# Altium PCB Himax.PcbDoc
Units mil, origin at the board's own origin, x right, y up, seen from the top; angles counter-clockwise.
Board outline 895 x 660 mil, 4 copper layers (Top Layer, GND, Signal Layer, Bottom Layer), stack 61.811 mil thick; 10 components, 15 nets, 62 pads, 14 vias.
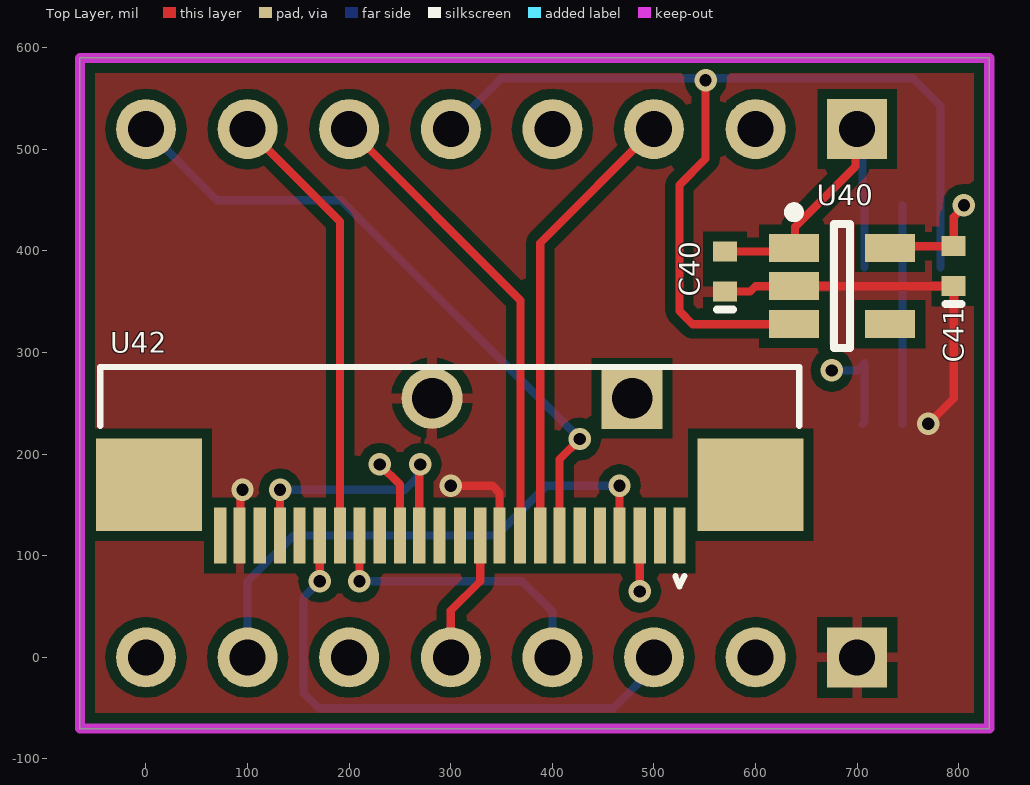
[diagram p0: Top Layer view]
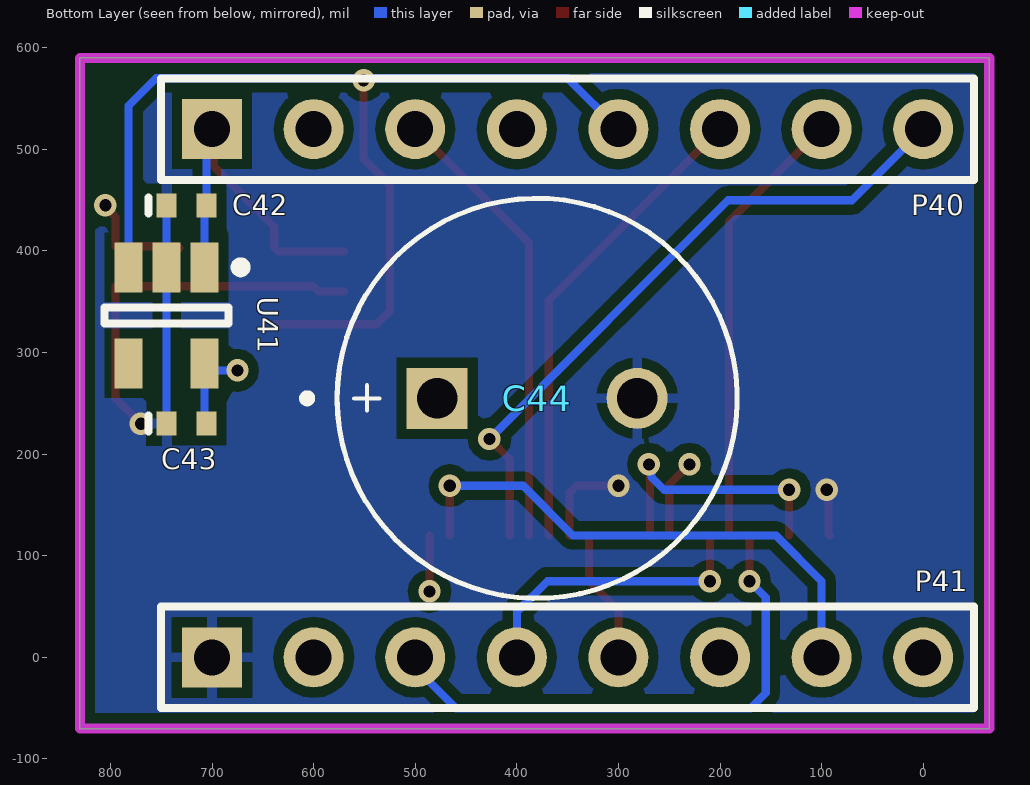
[diagram p1: Bottom Layer view, seen from below]
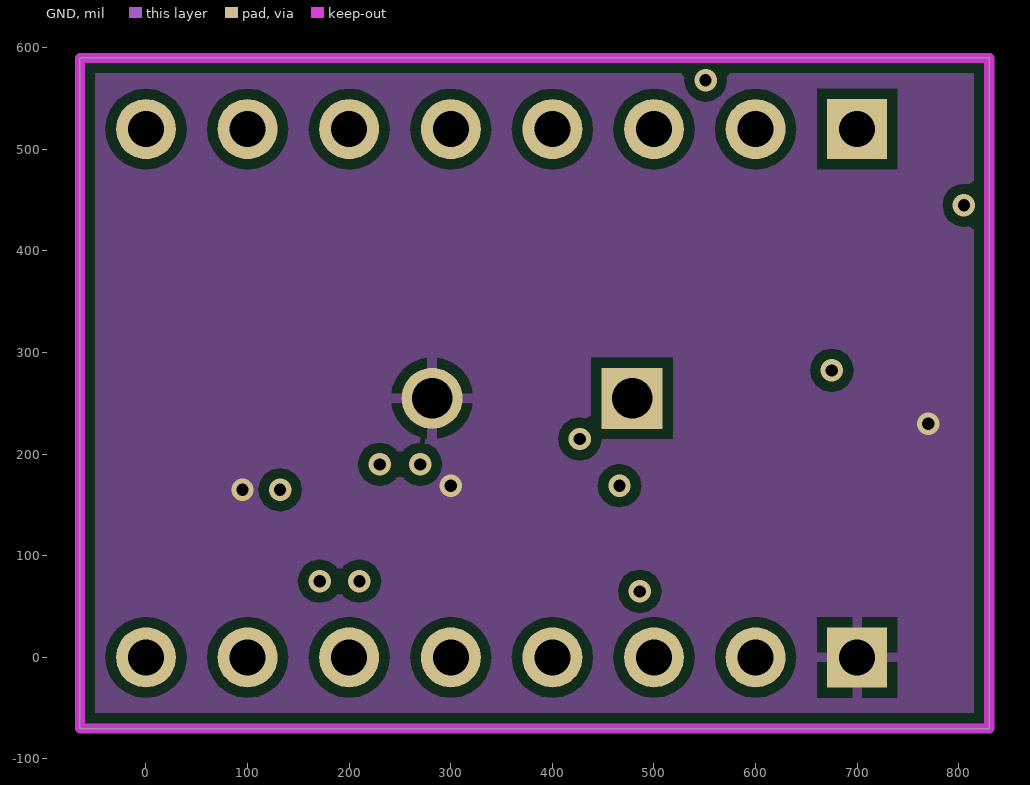
[diagram p2: GND]
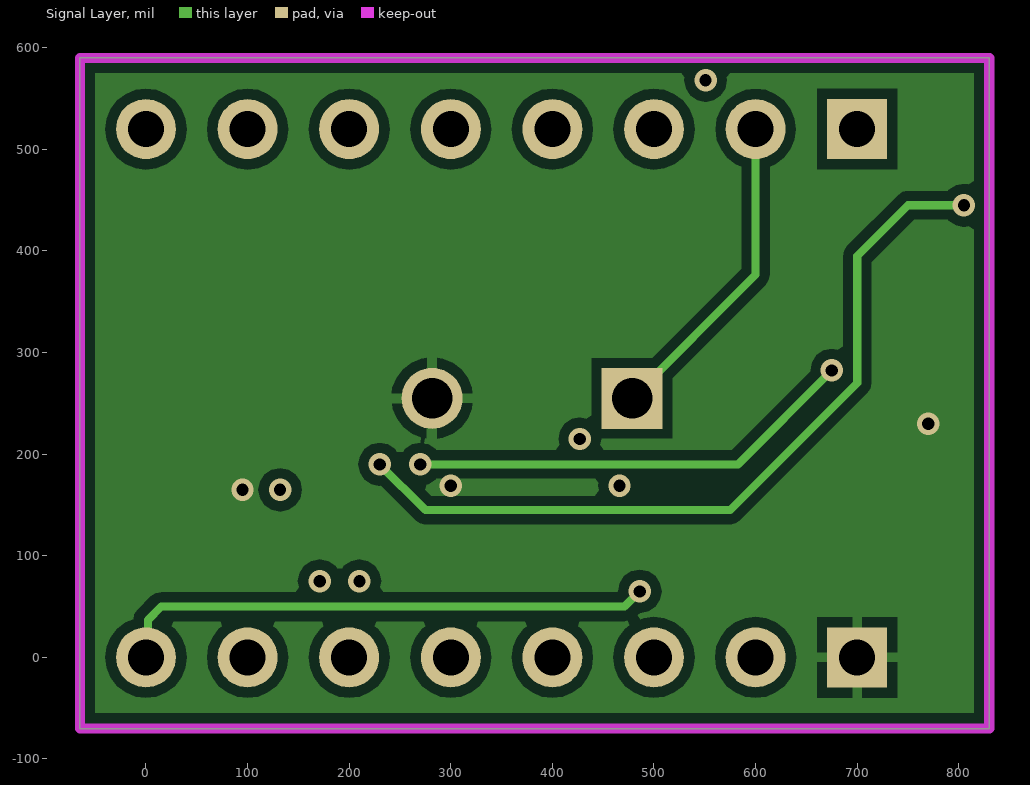
[diagram p3: Signal Layer]

## Layer stack, top to bottom
Top Solder: solder mask 0.7874, SM-001, Dk 4
Top Layer: signal copper 1.378
Dielectric 1: core 7.874, Core-043, Dk 4.3
GND: signal copper 0.689
Dielectric 3: prepreg 41.9291, Dk 4.2
Signal Layer: signal copper 0.689
Dielectric 2: core 7.874, Dk 4.2
Bottom Layer: signal copper 1.378
Bottom Solder: solder mask 0.7874, SM-001, Dk 4

## Board outline
-65,-70 -65,590 830,590 830,-70

## Design rules (kind name [scope] priority, off if disabled: settings)
Clearance Clearance_poly [InPolygon] p1: gap=10 ignorepadtopadclearanceinfootprint=FALSE
Clearance [All] p2: gap=6 ignorepadtopadclearanceinfootprint=FALSE except(10: THPad-Fill THPad-Poly THPad-Region Via-Fill Via-Poly Via-Region)
MinimumSolderMaskSliver [All] p1: minsoldermaskwidth=1
PolygonConnect [All] p1: thpad.connectstyle=Relief thpad.reliefconductorwidth=10 thpad.reliefentries=4 thpad.polygonreliefangle="90 Angle" thpad.airgapwidth=10 smdpad.connectstyle=Relief smdpad.reliefconductorwidth=10 smdpad.reliefentries=4 smdpad.polygonreliefangle="90 Angle" smdpad.airgapwidth=10 via.connectstyle=Direct via.reliefconductorwidth=10 via.reliefentries=4 via.polygonreliefangle="90 Angle" via.airgapwidth=10
RoomDefinition Himax [InComponentClass('Himax')] p1 off: confinementstyle=ConfineIn formatcopy=TRUE lockcomponents=FALSE outline -143.94,21.06 -143.94,548.94 113.35,548.94 113.35,581.34 188.35,581.34 188.35,585.37 251.65,585.37 251.65,579.37 286.65,579.37 286.65,576.65 449.37,576.65 449.37,565.94 486.69,565.94 486.69,401.26 491.69,401.26 491.69,253.18 493,253.18 493,248.02 501.47,248.02 501.47,-9.52 483.94,-9.52 483.94,-78.94 -43.94,-78.94 -43.94,21.06
RoutingVias [All] p1: holewidth=9.84 width=19.68 viastyle="Through Hole" minholewidth=7.87 minwidth=17.72 maxholewidth=19.68 maxwidth=39.37
SilkToSilkClearance [All] p1: silktosilkclearance=1
SilkToSolderMaskClearance [IsPad] p1: minsilkscreentomaskgap=1 clearancetoexposedcopper=TRUE
SolderMaskExpansion [All] p1: expansion=4 istentingtop=FALSE
SupplyNets "Schematic Supply Nets_3" [InNet('3V3')] p1: voltage=0.000
SupplyNets "Schematic Supply Nets_2" [InNet('VDD2V8')] p2: voltage=0.000
SupplyNets "Schematic Supply Nets_1" [InNet('GND')] p3: voltage=0.000
SupplyNets "Schematic Supply Nets" [InNet('VDD1V8')] p4: voltage=0.000
Width [All] p1: maxlimit=12 minlimit=6 preferedwidth=8 midlayer1_maxwidth=10 midlayer2_maxwidth=10 minimp=50.000000 maximp=50.000000 favimp=50.000000
27 further rules are at their usual default settings.

## Components (designator, comment, footprint, x,y, rotation, side; value= is the part's Value field where it differs from the comment)
C40 "Generic ceramic capacitor" 0402 570,379.69 r90 top value=1uF
C41 "Generic ceramic capacitor" 0402 795,385 r90 top value=1uF
C42 "Generic ceramic capacitor" 0402 725,445 r180 bottom value=1uF
C43 "Generic ceramic capacitor" 0402 725,230 r180 bottom value=1uF
C44 "Generic electrolytic capacitor" CAPPRD500W60D1000H3200 380,255 r180 bottom value=DNP
P40 "Header 8" HDR1X8 700,520 r180 bottom
P41 "Header 8" HDR1X8 700,0 r180 bottom
U40 "TPS70618" TI-DDC5_M 685,365.31 r0 top
U41 "TPS70628" TI-DDC5_M 744.69,336.74 r270 bottom
U42 "SFV24R-1STE1HLF" FCI_SFV24R-2STE1LF 299,38 r0 top

## Footprints (in the part's own frame and the unit in brackets; to place one, negate y for a bottom-side part, rotate by r counter-clockwise, add the part's x,y. Pads: shape width x height; smd on the part's side, far side on the other; paste and mask are expansions set on the pad)
0402 [mm] "Surface Mount; Body 1 x 0.5 mm (LxW typ)"
  rect 0.5x0.6 smd: 1(-0.5,0) 2(0.5,0)
  silkscreen extent -0.95,-0.2 -0.95,0.2, body extent -0.5,-0.25 0.5,0.25, height 0.5
CAPPRD500W60D1000H3200 [mil]
  round 60 hole 40: N(98.43,0)
  rect 60x60 hole 40: P(-98.43,0)
  silkscreen extent -230,-197 197,197
FCI_SFV24R-2STE1LF [mil]
  rect 12x55 smd: 1(-226,82) 2(-207,82) 3(-187,82) 4(-167,82) 5(-148,82) 6(-128,82) 7(-108,82) 8(-89,82) 9(-69,82) 10(-49,82) 11(-30,82) 12(-10,82) 13(10,82) 14(30,82) 15(49,82) 16(69,82) 17(89,82) 18(108,82) 19(128,82) 20(148,82) 21(167,82) 22(187,82) 23(207,82) 24(226,82)
  rect 104x91 smd: 25(-296,132) 26(296,132)
  silkscreen extent -344,32 344,248
HDR1X8 [mm] "Connector; Header; 8 Position"
  rect 1.5x1.5 hole 0.9: 1(0,0)
  round 1.5 hole 0.9: 2(2.54,0) 3(5.08,0) 4(7.62,0) 5(10.16,0) 6(12.7,0) 7(15.24,0) 8(17.78,0)
  silkscreen extent -1.27,-1.27 19.05,1.27
TI-DDC5_M [mm] "SOT23, 5-Leads, Body 2.9x1.6mm, Pitch 0.95mm, IPC Low Density"
  rect 1.25x0.7 smd: 1(-1.2,0.95) 2(-1.2,0) 3(-1.2,-0.95) 4(1.2,-0.95) 5(1.2,0.95)
  silkscreen extent -1.32,-1.55 0.2,1.97, body extent -0.87,-1.52 0.87,1.53, height 1.1

## Part data
C40 C41 C42 C43: library part C-1uF-10V-X5R-0402, "CAP CER 1UF 10V X5R 0402", Digi-Key Part Number=1276-1076-1-ND, Manufacturer="Samsung Electro-Mechanics", Manufacturer Part Number=CL05A105KP5NNNC, Rating="10V, -55~85C", Tolerance=+-10%
C44: library part cap_electrolytic, "Electrolytic capacitor", Note=10mF
P40 P41: "Header, 8-Pin", LatestRevisionDate=17-Jul-2002, LatestRevisionNote="Re-released for DXP Platform.", Publisher="Altium Limited"
U40: library part TPS706xx, "Linear Voltage Regulator IC Positive Fixed 1 Output 150mA SOT-23-5", Case/Package=SOT-23-5, Digi-Key Part Number=296-47896-1-ND, Dropout Voltage=245mV, Manufacturer="Texas Instruments", Manufacturer Part Number=TPS70618DBVR, Max Input Voltage=6.5V, Max Operating Temperature=125°C, Max Output Current=150mA, Min Current Limit=200mA, Min Input Voltage=2.7V, Min Operating Temperature=-40°C, Quiescent Current=1.3uA, Accuracy=2%, ComponentLink1Description="Manufacturer URL", ComponentLink1URL=http://www.ti.com/, ComponentLink2Description=Datasheet, ComponentLink2URL=http://www.ti.com/general/docs/lit/getliterature.tsp?genericPartNumber=TPS78001&fileType=pdf, ComponentLink3Description="Package Specification", ComponentLink3URL=http://www.ti.com/litv/pdf/mpds123d, Contact Plating=Gold, Lead Free="Lead Free", Mount="Surface Mount", Number of Outputs=1, Number of Pins=5, Number of Regulators=1, Output Current=150mA, Output Type=Fixed, Packaging="Cut Tape", Polarity=Positive, REACH SVHC="No SVHC"
U41: library part TPS706xx, "Linear Voltage Regulator IC Positive Fixed 1 Output 150mA SOT-23-5", Case/Package=SOT-23-5, Digi-Key Part Number=296-50141-1-ND, Dropout Voltage=245mV, Manufacturer="Texas Instruments", Manufacturer Part Number=TPS70628DBVR, Max Input Voltage=6.5V, Max Operating Temperature=125°C, Max Output Current=150mA, Min Current Limit=200mA, Min Input Voltage=2.7V, Min Operating Temperature=-40°C, Quiescent Current=1.3uA, Accuracy=2%, ComponentLink1Description="Manufacturer URL", ComponentLink1URL=http://www.ti.com/, ComponentLink2Description=Datasheet, ComponentLink2URL=http://www.ti.com/general/docs/lit/getliterature.tsp?genericPartNumber=TPS78001&fileType=pdf, ComponentLink3Description="Package Specification", ComponentLink3URL=http://www.ti.com/litv/pdf/mpds123d, Contact Plating=Gold, Lead Free="Lead Free", Mount="Surface Mount", Number of Outputs=1, Number of Pins=5, Number of Regulators=1, Output Current=150mA, Output Type=Fixed, Packaging="Cut Tape", Polarity=Positive, REACH SVHC="No SVHC"
U42: "Himax Camera Connector", Contact Resistance=30mR, Current Rating=500mA, Flammability Rating="UL94 V-0", Housing Color=Black, Insulation Resistance=100MR, Manufacturer="Amphenol FCI", Max Operating Temperature=105°C, Max Voltage Rating (AC)=50V, Min Operating Temperature=-55°C, Package Quantity=3000, Supplier Part Number 1=609-4320-1-ND, Actuator Material=Glass,Polyphenylene, ComponentLink1Description=http://portal.fciconnect.com/Comergent/fci/drawing/10112793.pdf?src-supplier=Avnet, ComponentLink1URL=http://portal.fciconnect.com/Comergent/fci/drawing/10112793.pdf?src-supplier=Avnet, ComponentLink2Description=https://cdn.amphenol-icc.com/media/wysiwyg/files/drawing/10112793.pdf?src-supplier=Digi-Key, ComponentLink2URL=https://cdn.amphenol-icc.com/media/wysiwyg/files/drawing/10112793.pdf?src-supplier=Digi-Key, ComponentLink3Description=http://portal.fciconnect.com/Comergent//fci/drawing/10112793.pdf?src-supplier=Mouser, ComponentLink3URL=http://portal.fciconnect.com/Comergent//fci/drawing/10112793.pdf?src-supplier=Mouser, Contact Location=Bottom, Contact Material=Bronze, Contact Plating=Tin, Depth=4.9mm, Housing Material=Polymer, Lead Free="Lead Free", Length=17.5mm, Manufacturer Part Number=SFV24R-1STE1HLF, Max Voltage Rating (DC)=50V, Mount="Surface Mount", Number of Contacts=24, Number of Positions=24, Number of Rows=1, Orientation="Right Angle", Packaging="Tape and Reel", Pitch=0.5mm, Pricing 1="1=0.76, 10=0.67, 25=0.6308, 50=0.6044, 100=0.5782, 250=0.5256, 500=0.47304, 1000=0.42048 (USD)", Radiation Hardening=No, Stock 1=0, Supplier 1=Digi-Key, Termination=Solder, Voltage Rating=50V, Wire/Cable Type=Straight

## Via types
v1: diameter 22, hole 12, Top Layer to Bottom Layer, tented both sides, 14 vias

## Nets (pads, with @x,y where several pads share a name; then routed paths per layer and width w, separated by ;. In a path a pad name is that pad's centre, name@x,y a point inside that pad or via, vN(x,y) a via of type N, cw(c..) or ccw(c..) an arc to the next point about the centre after c; other vN are vias at no path point)
3V3: C40.2 C42.2 P40.1 U40.1 U41.1 | length 351.2
  Top Layer w8: C40.2 634.41,399.37 U40.1 638.81,403.77 638.81,423.81 698.16,483.16 698.16,518.16 P40.1
  Bottom Layer w8: P40.1 705.31,514.69 C42.2 707.28,443.03 U41.1
Boost: C44.P P40.2 | length 315.4
  Signal Layer w8: C44.P 600,376.57 P40.2
D0: P41.5 U42.14 | length 132
  Top Layer w8: P41.5 300,46 329,75 U42.14
EN_CAM: P40.5 U40.3 U41.3 | length 1029.9
  Top Layer w8: v1(550.8,568) 550.8,490.8 525,465 525,341 538.09,327.91 U40.3
  Bottom Layer w8: P40.5 350,570 548.8,570 v1(550.8,568) ; v1@550.8,569.24 551.55,570 755,570 782.09,542.91 U41.3
FVLD: P41.3 U42.6 | length 539.4
  Top Layer w8: v1(171,75) U42.6
  Bottom Layer w8: v1(171,75) 155,59 155,-35 170,-50 460,-50 500,-10 P41.3
GND: C40.1 C41.1 C42.1 C43.1 C44.N P41.1 U40.2 U41.2 U42.2 U42.15 | length 727
  Top Layer w8: U42.2 93.16,121.16 93.16,163.16 v1(95,165) ; v1(300,169) 341,169 348,162 U42.15 ; C40.1 594.69,360 600,365.31 U40.2 C41.1 795,255 v1(770,230)
  Bottom Layer w8: C43.1 U41.2 C42.1
INT: P40.8 U42.18 | length 656.6
  Top Layer w8: U42.18 407,195 v1(427,215)
  Bottom Layer w8: P40.8 70,450 192,450 v1(427,215)
LVLD: P40.6 U42.16 | length 470.1
  Top Layer w8: P40.6 368.58,351.42 368.58,120.58 U42.16
MCLK: P41.4 U42.8 | length 292.4
  Top Layer w8: v1(210,75) U42.8
  Bottom Layer w8: v1(210,75) 370,75 400,45 P41.4
PCLK: P40.3 U42.17 | length 446.4
  Top Layer w8: U42.17 388,408 P40.3
SCL: P41.7 U42.21 | length 528.9
  Top Layer w8: U42.21 v1(466,169)
  Bottom Layer w8: P41.7 100,75 145,120 345,120 394,169 v1(466,169)
SDA: P41.8 U42.22 | length 588.4
  Top Layer w8: v1(486,65) U42.22
  Signal Layer w8: P41.8 1.84,1.84 1.84,36.84 15,50 471,50 v1(486,65)
Trig: P40.7 U42.7 | length 437.7
  Top Layer w8: P40.7 191,429 U42.7
VDD1V8: C41.2 U40.5 U42.10 | length 977.4
  Top Layer w8: v1(230,190) 250,170 U42.10 ; U40.5 734.21,404.69 C41.2 795,433.31 805,443.31 v1(805,445)
  Signal Layer w8: v1(230,190) 275,145 575,145 700,270 700,395 750,445 v1(805,445)
VDD2V8: C43.2 U41.5 U42.4 U42.11 | length 808.4
  Top Layer w8: U42.4 v1(132,165) ; U42.11 269,189 v1(270,190)
  Signal Layer w8: v1(270,190) 582.5,190 v1(675,282.5)
  Bottom Layer w8: v1(132,165) 255,165 267.32,177.32 267.32,187.32 v1(270,190) ; v1(675,282.5) 700.28,282.5 U41.5 707.28,231.97 C43.2
pads on no net: P40.4 P41.2 P41.6 U40.4 U41.4 U42.1 U42.3 U42.5 U42.9 U42.12 U42.13 U42.19 U42.20 U42.23 U42.24 U42.25 U42.26

## Polygon pours and split planes (outlines as drawn)
GND on Signal Layer "GND_L03_P020" (solid, pour order 20): -55,590 -55,-75 830,-75 830,590
GND on GND "GND_L02_P018" (solid, pour order 18): -55,590 -55,-75 830,-75 830,590
GND on Bottom Layer "Bottom Layer-GND" (solid, pour order 16): 830,590 830,-70 -55,-70 -55,590
GND on Top Layer "GND_L01_P002" (solid, pour order 2): 830,590 830,-65.83 -55,-65.83 -55,590

## Keep-outs
Keep-Out Layer:
  the board outline again, w10

## Silkscreen, mask and mechanical layers (free items; w line width, h text height)
Bottom Overlay:
  lines w4: 535,255 560,255 ; 547.5,242.87 547.5,267.87
Mechanical 1:
  the board outline again, w10